# EAGLE board negasilk (EAGLE 5.10)

No outline drawn. Coordinates in mm, seen from the top.
Copper layers (1*16): Top 0.035mm / dielectric 1.5mm / Bottom 0.035mm
Design rules "default": minimum track width 10mil, minimum drill 0.6mm, track to track 8mil, track to pad 8mil, pad to pad 8mil, via to via 8mil, smd to smd 8mil, copper to edge 18mil, drill to drill 8mil, minimum pad ring 10mil, minimum via ring 8mil, stop-mask expansion 4mil, vias tented up to drill 0mil, thermal gap 10mil
tRestrict: area 12.7,1.3 to 16.5,5.1

## Placement (x,y rotation side)
E$1  [EXIT]  0,10.16 0 top

## Library data of the parts
E$1 = negasilk

## Tracks (layer width: path | path; a pad name or v marks a point on that pad's centre or on a via)
S$1
  pour Top: 0,0 0,6.35 18.41,6.35 18.41,0

## Text on the board
tRestrict: EXIT